# EAGLE board Mpr121Shield (EAGLE 7.4.0)
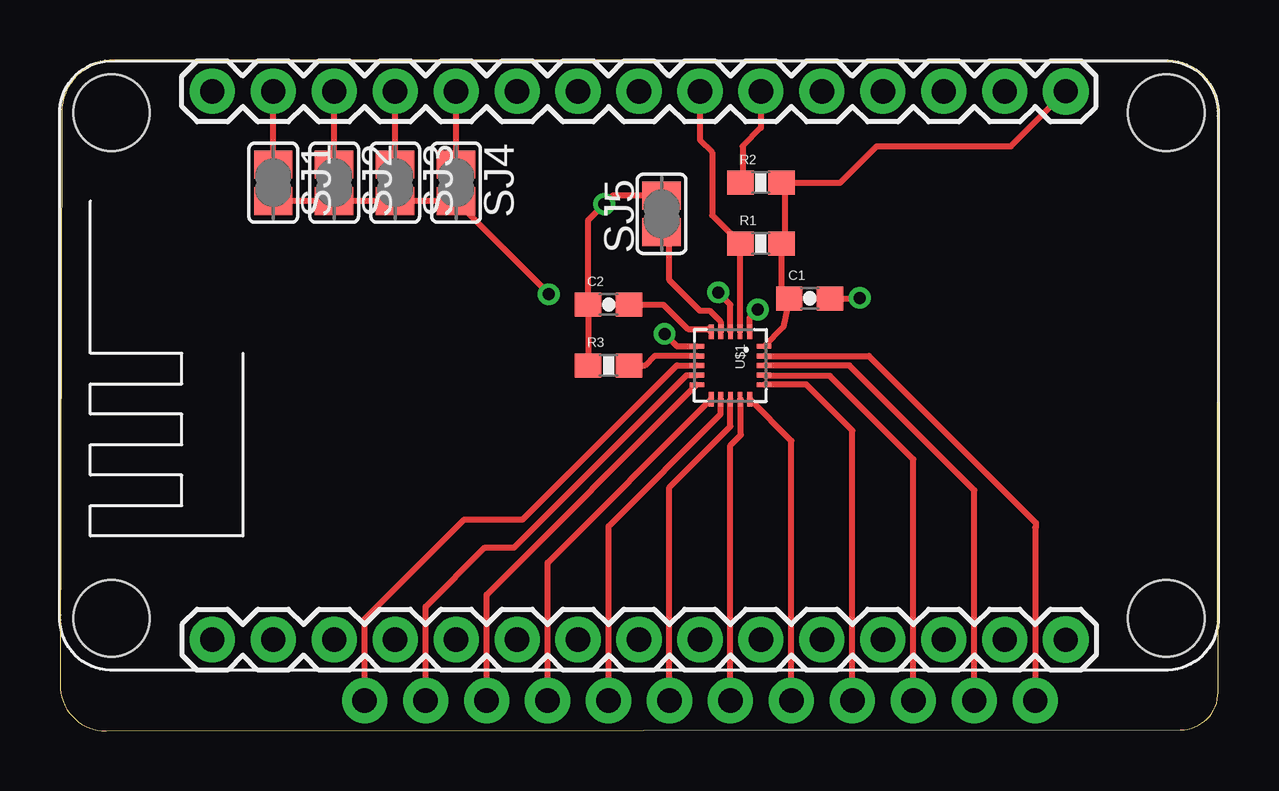
[diagram p0: board, top side]
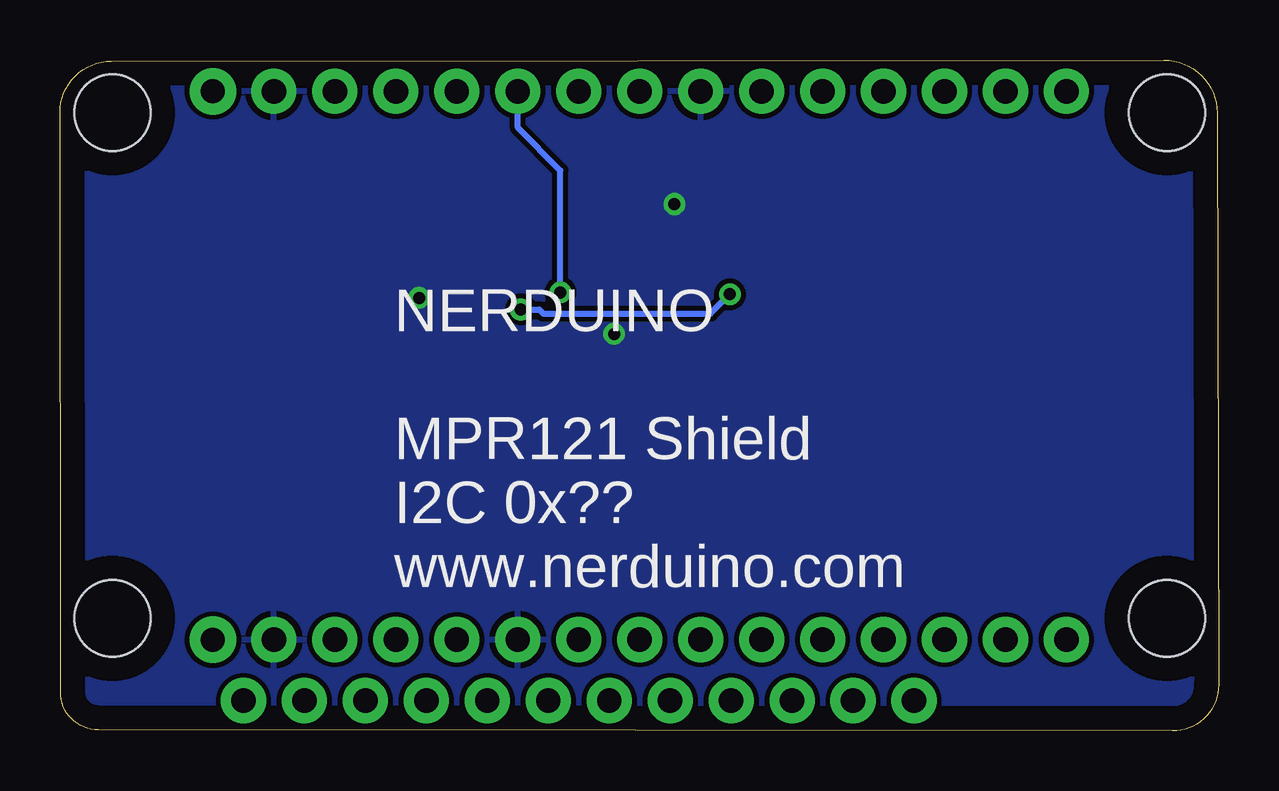
[diagram p1: board, bottom side, seen from below]

Size 48.28 x 27.98 mm. Coordinates in mm from the lower left corner, seen from the top.
Outline: 48.26,1.62 48.28,25.78 arc90 46.14,27.93 2.28,27.98 arc90 0.06,25.77 0,1.93 arc90 1.92,0 46.69,0.05 arc90 48.26,1.62
Copper layers (1*16): Top 0.035mm / dielectric 1.5mm / Bottom 0.035mm
Design rules "default": minimum track width 10mil, minimum drill 24mil, track to track 8mil, track to pad 8mil, pad to pad 8mil, via to via 8mil, smd to smd 8mil, copper to edge 40mil, drill to drill 8mil, minimum pad ring 10mil, minimum via ring 8mil, stop-mask expansion 4mil, vias tented up to drill 0mil, thermal gap 10mil

## Footprints (pad centres in the part's own frame; a part is rotated, then mirrored left to right if it is on the bottom)
0603-CAP = smd 1.1 x 1: 1 -0.85,0; 2 0.85,0
1X12_NO_SILK = drill 1.016 pad 1.88: 1 0,0; 2 2.54,0; 3 5.08,0; 4 7.62,0; 5 10.16,0; 6 12.7,0; 7 15.24,0; 8 17.78,0; 9 20.32,0; 10 22.86,0; 11 25.4,0; 12 27.94,0
0603-RES = smd 1.1 x 1: 1 -0.85,0; 2 0.85,0
SJ = smd 1.168 x 1.6: 1 -0.762,0; 2 0.762,0
QFN-20-0.4MM = smd 0.6 x 0.2: 1 -1.4,0.8; 2 -1.4,0.4; 3 -1.4,0; 4 -1.4,-0.4; 5 -1.4,-0.8; 11 1.4,-0.8; 12 1.4,-0.4; 13 1.4,0; 14 1.4,0.4; 15 1.4,0.8 | smd 0.2 x 0.6: 6 -0.8,-1.4; 7 -0.4,-1.4; 8 0,-1.4; 9 0.4,-1.4; 10 0.8,-1.4; 16 0.8,1.4; 17 0.4,1.4; 18 0,1.4; 19 -0.4,1.4; 20 -0.8,1.4
NERDUINO_STACK = drill 1.016 pad 1.88: 1 -17.78,-5.08; 2 -15.24,-5.08; 3 -12.7,-5.08; 4 -10.16,-5.08; 5 -7.62,-5.08; 6 -5.08,-5.08; 7 -2.54,-5.08; 8 0,-5.08; 9 2.54,-5.08; 10 5.08,-5.08; 11 7.62,-5.08; 12 10.16,-5.08; 13 12.7,-5.08; 14 15.24,-5.08; 17 15.24,17.78; 18 12.7,17.78; 19 10.16,17.78; 20 7.62,17.78; 21 5.08,17.78; 22 2.54,17.78; 23 0,17.78; 24 -2.54,17.78; 25 -5.08,17.78; 26 -7.62,17.78; 27 -10.16,17.78; 28 -12.7,17.78; 29 -15.24,17.78; 30 -17.78,17.78 | drill 1 pad 1.93: 15 17.78,-5.08; 16 17.78,17.78 | hole 3.175: -21.971,16.891; -21.971,-4.191; 21.971,-4.191; 21.971,16.891

## Placement (x,y rotation side)
C1  .1uF  [0603-CAP]  31.24,18.03 0 top
C2  .1uF  [0603-CAP]  22.85,17.78 0 top
JP3  [1X12_NO_SILK]  40.63,1.27 180 top
R1  4.7K  [0603-RES]  29.2,20.32 0 top
R2  4.7K  [0603-RES]  29.2,22.86 0 top
R3  4.7K  [0603-RES]  22.85,15.24 0 top
SJ1  [SJ]  8.88,22.86 270 top
SJ2  [SJ]  11.42,22.86 270 top
SJ3  [SJ]  13.96,22.86 270 top
SJ4  [SJ]  16.5,22.86 270 top
SJ5  [SJ]  25.06,21.56 90 top
U$1  MPR121QFN20  [QFN-20-0.4MM]  27.93,15.24 270 top
U$2  NERDSHIELD  [NERDUINO_STACK]  24.12,8.89 0 top

## Library data of the parts
C1 C2 R1-R3 = SparkFun
JP3 = SparkFun-Connectors
SJ1-SJ5 = jumper
U$1 = SparkFun-Sensors
U$2 = NerduinoShieldLib

## Nets
+3V3: C1.1 R1.2 R2.2 U$1.20 U$2.16
GND: C1.2 C2.1 R3.1 SJ5.2 U$1.6 U$2.10 U$2.14 U$2.17 U$2.24
N$1: JP3.1 U$1.19
N$2: R1.1 U$1.2 U$2.22
N$3: JP3.2 U$1.18
N$4: R2.1 U$1.3 U$2.21
N$5: JP3.3 U$1.17
N$6: JP3.4 U$1.16
N$7: JP3.5 U$1.15
N$8: JP3.6 U$1.14
N$9: JP3.7 U$1.13
N$10: JP3.8 U$1.12
N$11: JP3.9 U$1.11
N$12: JP3.10 U$1.10
N$13: JP3.11 U$1.9
N$14: JP3.12 U$1.8
N$15: C2.2 U$1.5
N$16: R3.2 U$1.7
N$18: SJ5.1 U$1.4
N$19: SJ1.2 SJ2.2 SJ3.2 SJ4.2 U$1.1
N$20: SJ1.1 U$2.29
N$21: SJ2.1 U$2.28
N$22: SJ3.1 U$2.27
N$23: SJ4.1 U$2.26

## Tracks (layer width: path | path; a pad name or v marks a point on that pad's centre or on a via)
+3V3
  Top 0.254: U$2.16 39.62,24.38 34.03,24.38 32.51,22.86 R2.2 30.22,22.69 30.22,20.57 30.05,20.41 R1.2 30.05,18.11 C1.1 30.13,16.84 U$1.20
GND  (via drill 0.5)
  Top 0.254: R3.1 C2.1 22,21.3 v22.68,21.97 23.03,22.32 SJ5.2 | U$1.6 25.71,16.04 v25.19,16.56 | C1.2 33.29,18.03 v33.32,18.06
  Bottom 0.254: v25.19,16.56 25.14,16.56 25.12,16.53 | v33.32,18.06 33.32,17.9 33.19,17.78 | v22.68,21.97 22.63,21.97 22.4,21.74
  pour Bottom: 0.07,0.02 48.31,0.1 48.28,27.94 0.05,27.86
N$1
  Top 0.254: U$1.19 33.71,15.64 40.66,8.68 40.66,8.51 40.63,8.48 JP3.1
N$2
  Top 0.254: U$2.22 26.66,24.64 27.17,24.13 27.17,21.5 R1.1 28.33,20.3 U$1.2
N$3
  Top 0.254: JP3.2 38.09,10.03 32.89,15.24 U$1.18
N$4  (via drill 0.5)
  Top 0.254: U$2.21 29.2,25.14 28.44,24.38 28.44,22.95 R2.1 | U$1.3 27.93,17.78 v27.43,18.29
  Bottom 0.254: v27.43,18.29 27.43,23.37 29.2,25.14 U$2.21
N$5
  Top 0.254: JP3.3 35.55,11.33 32.07,14.81 29.37,14.81 U$1.17
N$6
  Top 0.254: JP3.4 33.01,12.52 31.08,14.45 29.35,14.45 U$1.16
N$7
  Top 0.254: JP3.5 30.47,12.1 U$1.15
N$8
  Top 0.254: JP3.6 27.93,11.91 28.37,12.34 28.37,13.81 U$1.14
N$9
  Top 0.254: JP3.7 25.39,10.16 27.93,12.7 U$1.13
N$10
  Top 0.254: JP3.8 22.85,8.53 27.53,13.21 U$1.12
N$11
  Top 0.254: JP3.9 20.31,7.02 U$1.11
N$12
  Top 0.254: JP3.10 17.77,5.68 U$1.10
N$13
  Top 0.254: JP3.11 15.23,5.18 17.7,7.64 18.92,7.64 26.11,14.83 U$1.9
N$14
  Top 0.254: JP3.12 12.69,4.67 16.83,8.81 19.27,8.81 25.7,15.24 U$1.8
N$15
  Top 0.254: C2.2 25.14,17.78 26.16,16.76 27.01,16.76 U$1.5
N$16
  Top 0.254: R3.2 24.38,15.24 24.79,15.64 U$1.7
N$18
  Top 0.254: U$1.4 27.53,17.07 27.07,17.52 26.66,17.52 25.39,18.79 25.39,20.47 SJ5.1
N$19  (via drill 0.5)
  Top 0.254: U$1.1 28.73,17.23 v29.08,17.57 | v20.37,18.21 20.37,18.23 SJ4.2 SJ3.2 SJ2.2 SJ1.2
  Bottom 0.254: v29.08,17.57 28.32,17.57 28.14,17.4 21.18,17.4 v20.37,18.21
N$20
  Top 0.254: SJ1.1 U$2.29
N$21
  Top 0.254: SJ2.1 U$2.28
N$22
  Top 0.254: SJ3.1 U$2.27
N$23
  Top 0.254: SJ4.1 U$2.26

## Text on the board
_bsilk: NERDUINO / / MPR121 Shield / I2C 0x?? / www.nerduino.com